# Altium PCB PCB1.PcbDoc
Units mm, origin at the board's own origin, x right, y up, seen from the top; angles counter-clockwise.
Board outline 35.8 x 35.8 mm, 2 copper layers (Top Layer, Bottom Layer), stack 1.569 mm thick; 44 components, 35 nets, 132 pads, 30 vias.
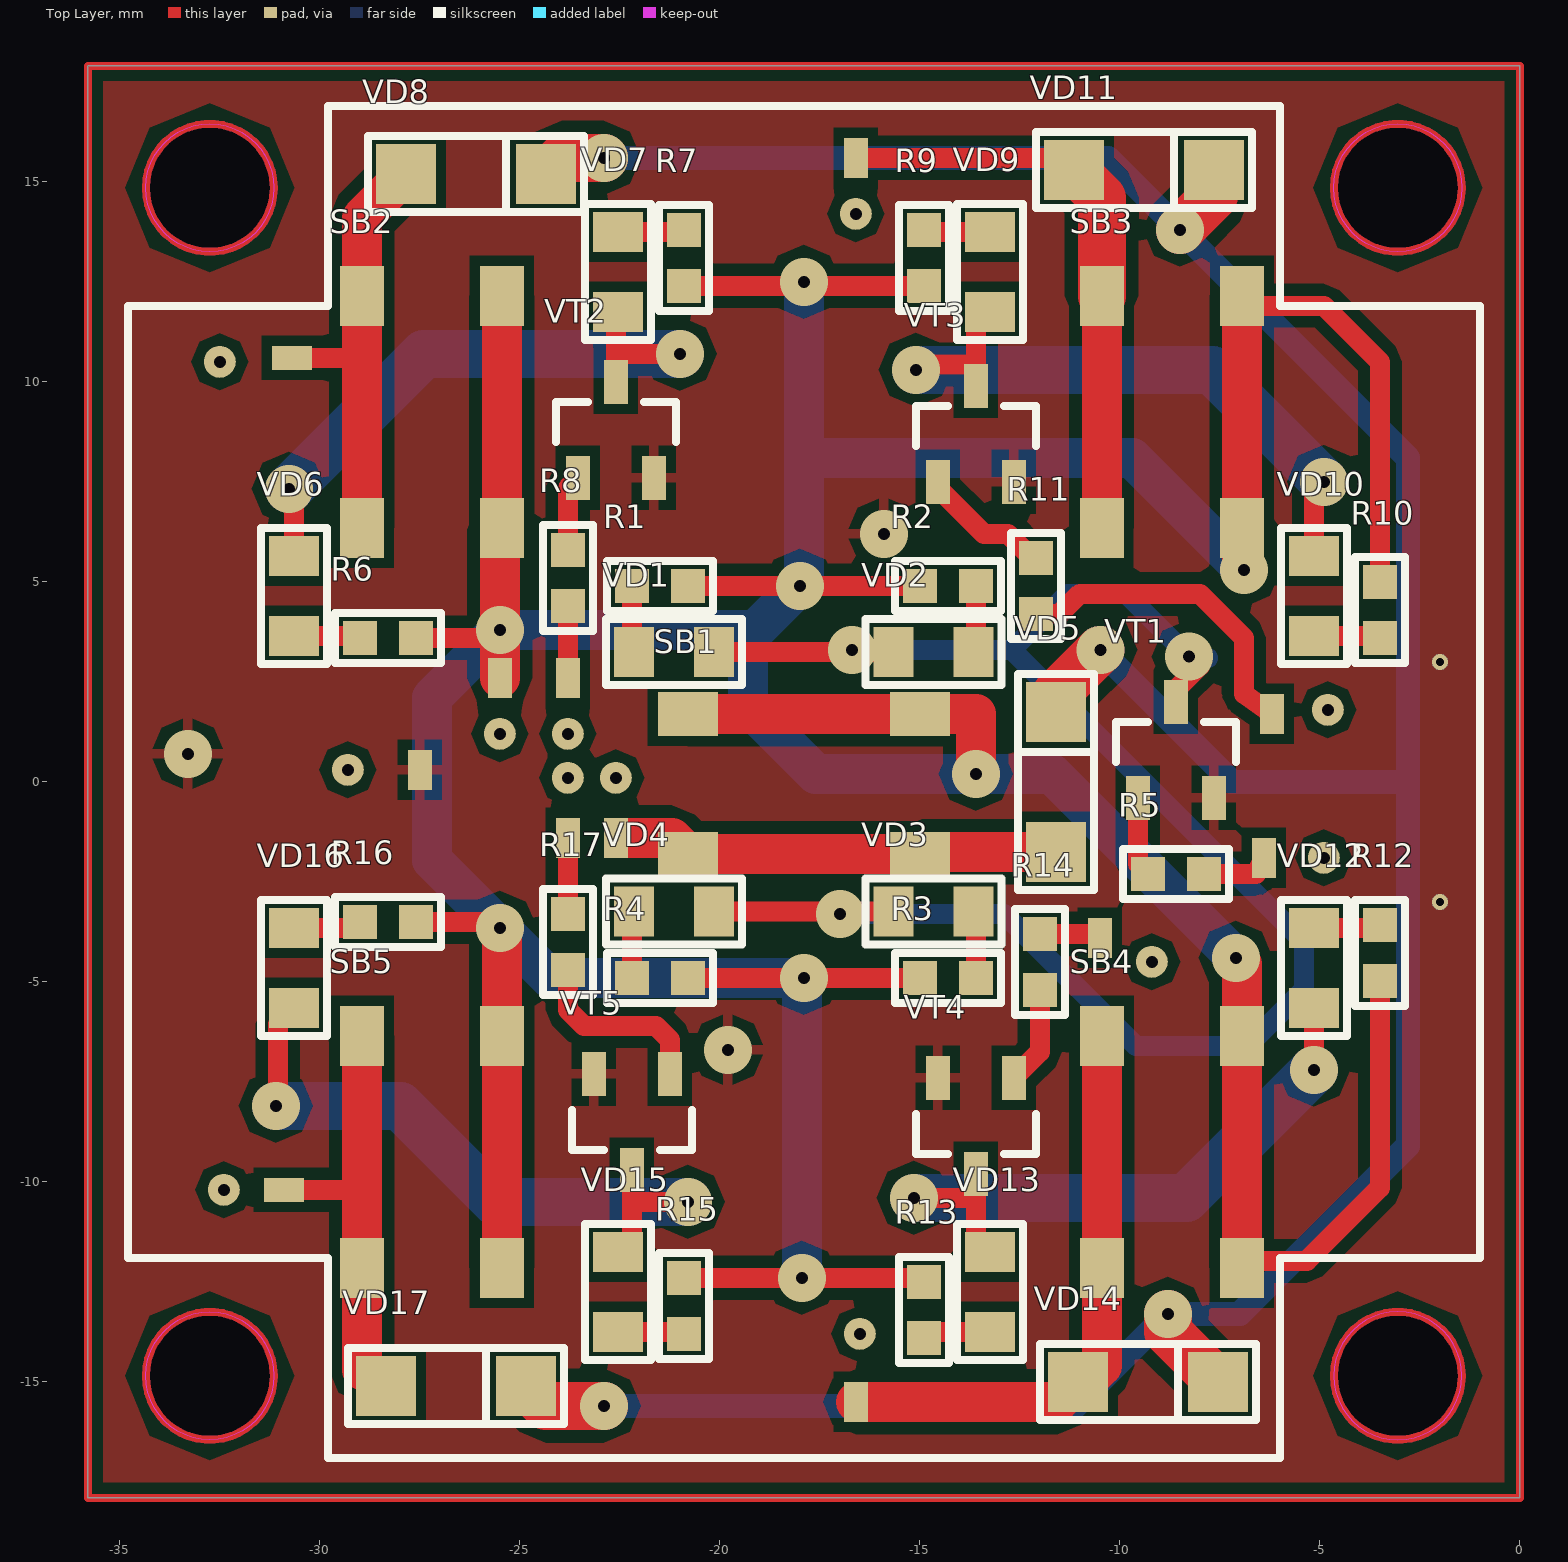
[diagram p0: Top Layer view]
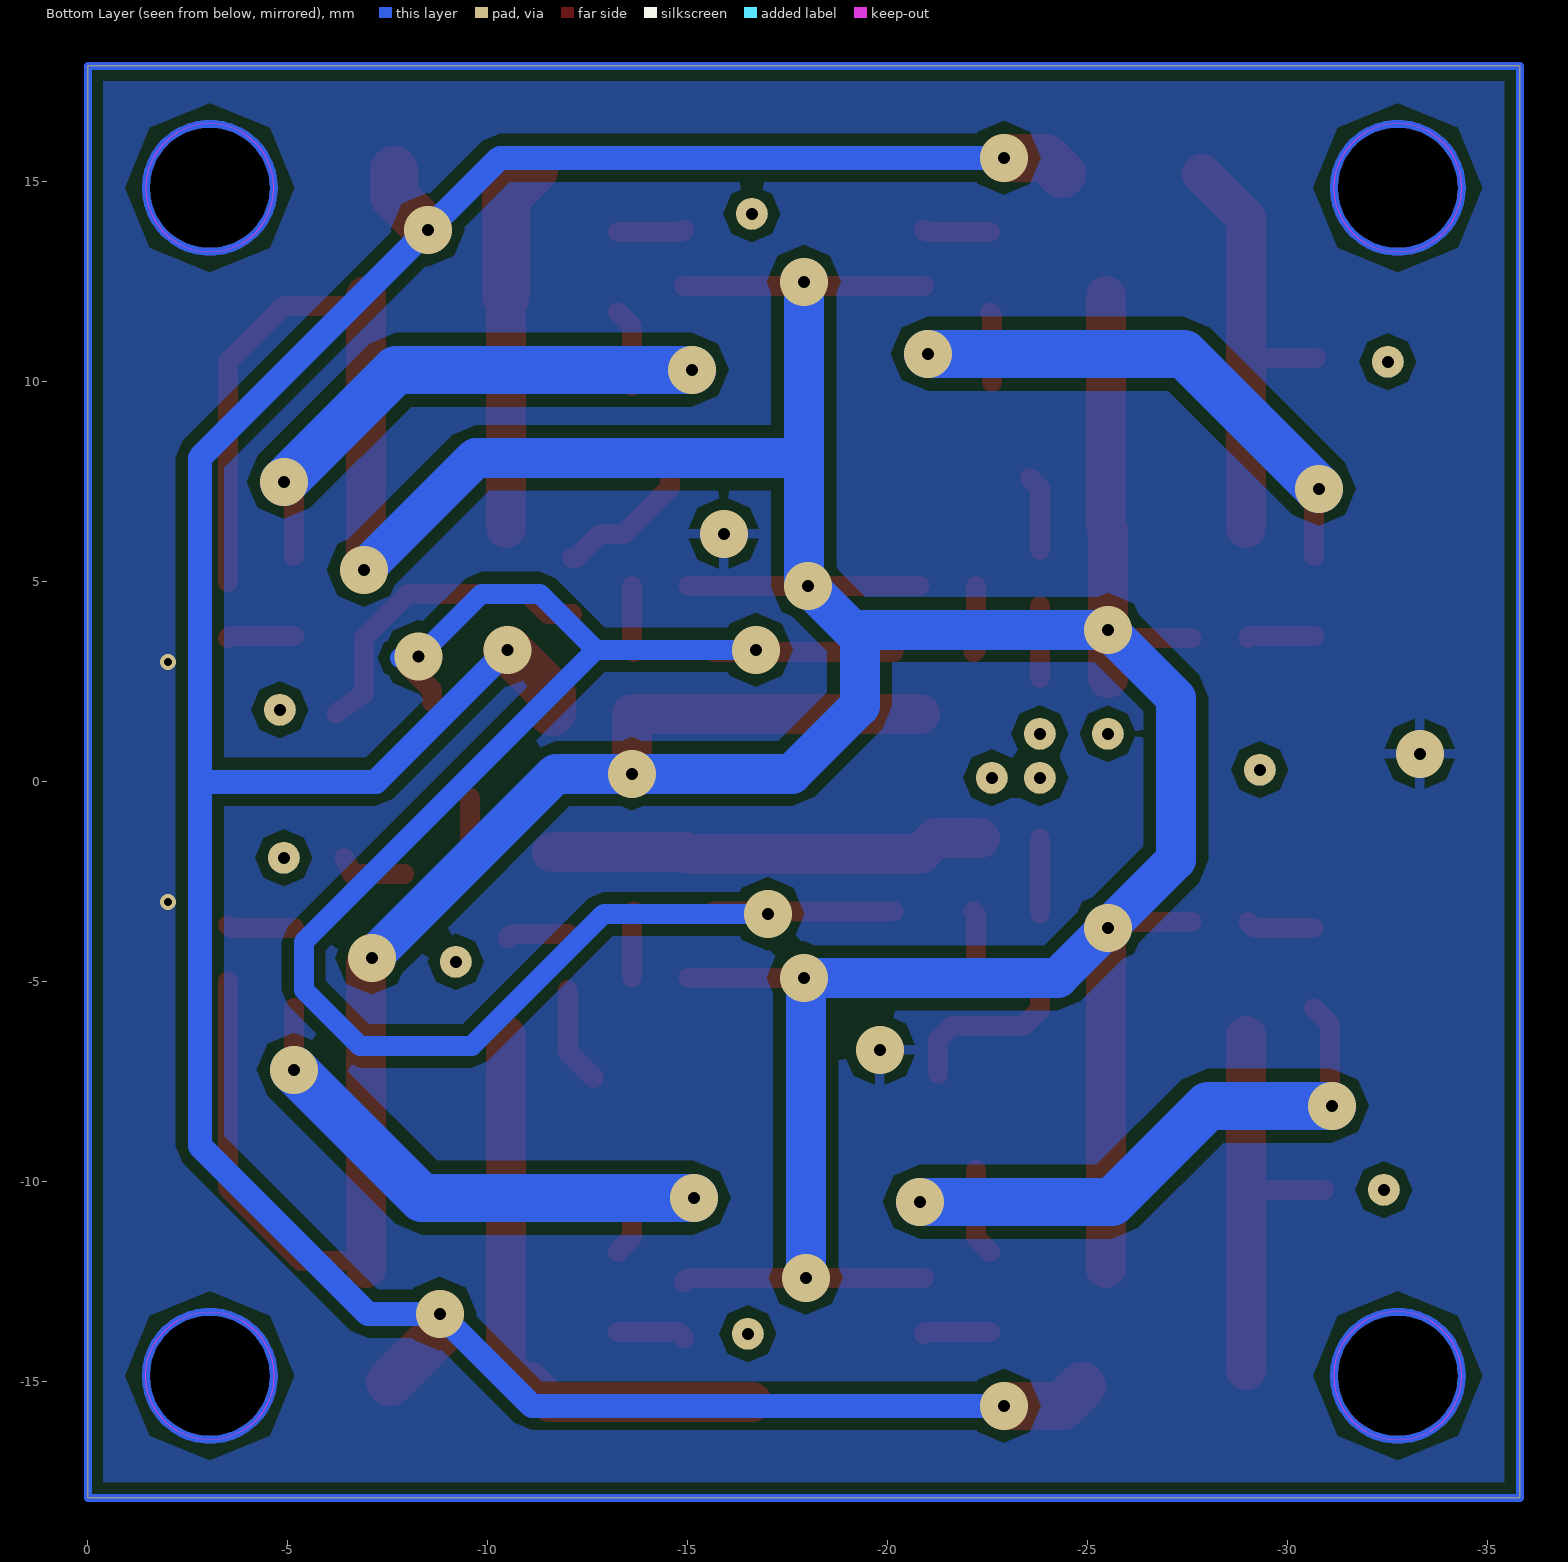
[diagram p1: Bottom Layer view, seen from below]
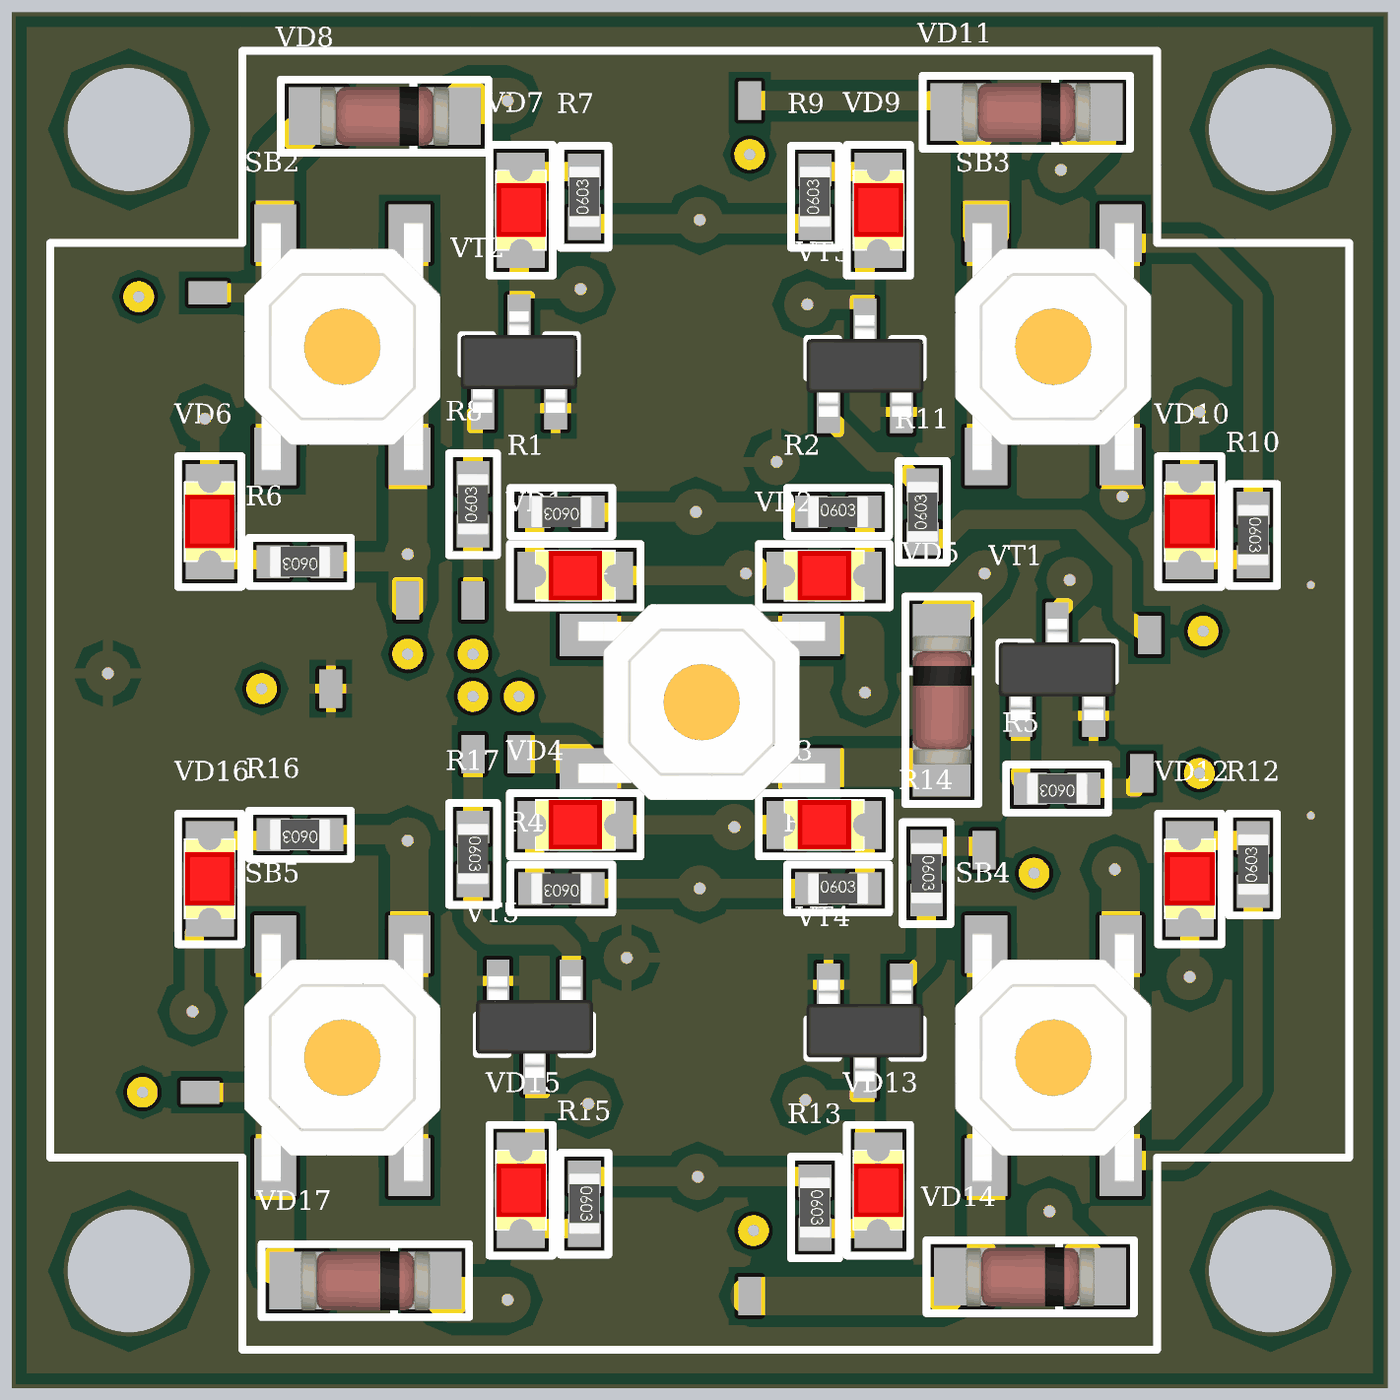
[diagram p2: 3D render of the assembled board from above, using the file's embedded part models]

## Layer stack, top to bottom
Top Solder: solder mask 0.0254, SM-001, Dk 4
Top Layer: signal copper 0.035
Dielectric 1: core 1.4986, Core-043, Dk 4.3
Bottom Layer: signal copper 0.035
Bottom Solder: solder mask 0.0254, SM-001, Dk 4

## Board outline
-35.8,2.1 -35.8,17.9 0,17.9 0,-17.9 -35.8,-17.9
cut-out: -4.65,-14.85 ccw(c-3.05,-14.85) -3.05,-16.45 ccw(c-3.05,-14.85) -1.45,-14.85 ccw(c-3.05,-14.85) -3.05,-13.25 ccw(c-3.05,-14.85)
cut-out: -3.05,13.25 cw(c-3.05,14.85) -4.65,14.85 cw(c-3.05,14.85) -3.05,16.45 cw(c-3.05,14.85) -1.45,14.85 cw(c-3.05,14.85)
cut-out: -32.75,-16.45 cw(c-32.75,-14.85) -34.35,-14.85 cw(c-32.75,-14.85) -32.75,-13.25 cw(c-32.75,-14.85) -31.15,-14.85 cw(c-32.75,-14.85)
cut-out: -32.75,13.25 cw(c-32.75,14.85) -34.35,14.85 cw(c-32.75,14.85) -32.75,16.45 cw(c-32.75,14.85) -31.15,14.85 cw(c-32.75,14.85)

## Design rules (kind name [scope] priority, off if disabled: settings)
Clearance [All] p1: gap=0.254 ignorepadtopadclearanceinfootprint=FALSE except(0: Arc-Hole Track-Hole SMDPad-Hole THPad-Hole Via-Hole Fill-Hole Poly-Hole Region-Hole Text-Hole)
PolygonConnect [All] p1: connectstyle=Relief reliefconductorwidth=0.254 reliefentries=4 polygonreliefangle="90 Angle" airgapwidth=0.254
RoutingVias [All] p1: holewidth=0.711 width=1.27 viastyle="Through Hole" minholewidth=0.711 minwidth=1.27 maxholewidth=0.711 maxwidth=1.27
SolderMaskExpansion [All] p1: expansion=0.102 istentingtop=FALSE
Width [All] p1: maxlimit=5 minlimit=0.1 preferedwidth=0.254
30 further rules are at their usual default settings.

## Components (designator, comment, footprint, x,y, rotation, side; value= is the part's Value field where it differs from the comment)
R1 "Resistor film, 100R, ±5%, 0603, 0.1W, -55...+125°C" "RES: 0603" -21.5,4.9 r180 top value=100R
R2 "Resistor film, 100R, ±5%, 0603, 0.1W, -55...+125°C" "RES: 0603" -14.3,4.9 r0 top value=100R
R3 "Resistor film, 100R, ±5%, 0603, 0.1W, -55...+125°C" "RES: 0603" -14.3,-4.9 r0 top value=100R
R4 "Resistor film, 100R, ±5%, 0603, 0.1W, -55...+125°C" "RES: 0603" -21.5,-4.9 r180 top value=100R
R5 "Resistor film, 100R, ±5%, 0603, 0.1W, -55...+125°C" "RES: 0603" -8.6,-2.3 r180 top value=100R
R6 "Resistor film, 100R, ±5%, 0603, 0.1W, -55...+125°C" "RES: 0603" -28.3,3.6 r180 top value=100R
R7 "Resistor film, 100R, ±5%, 0603, 0.1W, -55...+125°C" "RES: 0603" -20.9,13.1 r90 top value=100R
R8 "Resistor film, 100R, ±5%, 0603, 0.1W, -55...+125°C" "RES: 0603" -23.8,5.1 r90 top value=100R
R9 "Resistor film, 100R, ±5%, 0603, 0.1W, -55...+125°C" "RES: 0603" -14.9,13.1 r90 top value=100R
R10 "Resistor film, 100R, ±5%, 0603, 0.1W, -55...+125°C" "RES: 0603" -3.5,4.3 r270 top value=100R
R11 "Resistor film, 100R, ±5%, 0603, 0.1W, -55...+125°C" "RES: 0603" -12.1,4.9 r90 top value=100R
R12 "Resistor film, 100R, ±5%, 0603, 0.1W, -55...+125°C" "RES: 0603" -3.5,-4.275 r90 top value=100R
R13 "Resistor film, 100R, ±5%, 0603, 0.1W, -55...+125°C" "RES: 0603" -14.9,-13.2 r270 top value=100R
R14 "Resistor film, 100R, ±5%, 0603, 0.1W, -55...+125°C" "RES: 0603" -12,-4.5 r270 top value=100R
R15 "Resistor film, 100R, ±5%, 0603, 0.1W, -55...+125°C" "RES: 0603" -20.9,-13.1 r270 top value=100R
R16 "Resistor film, 100R, ±5%, 0603, 0.1W, -55...+125°C" "RES: 0603" -28.3,-3.5 r180 top value=100R
R17 "Resistor film, 100R, ±5%, 0603, 0.1W, -55...+125°C" "RES: 0603" -23.8,-4 r270 top value=100R
SB1 "Tactile button, 6x6mm" "BUT: 5X5 SMD" -17.9,0 r180 top
SB2 "Tactile button, 6x6mm" "BUT: 5X5 SMD" -27.15,9.25 r90 top locked
SB3 "Tactile button, 6x6mm" "BUT: 5X5 SMD" -8.65,9.25 r90 top locked
SB4 "Tactile button, 6x6mm" "BUT: 5X5 SMD" -8.65,-9.25 r90 top locked
SB5 "Tactile button, 6x6mm" "BUT: 5X5 SMD" -27.15,-9.25 r90 top locked
VD1 "LED, Green, *, *, *, -55...+150°C" "LED: 0805R" -21.14,3.24 r0 top locked
VD2 "LED, Green, *, *, *, -55...+150°C" "LED: 0805R" -14.66,3.24 r180 top locked
VD3 "LED, Green, *, *, *, -55...+150°C" "LED: 0805R" -14.66,-3.24 r180 top locked
VD4 "LED, Green, *, *, *, -55...+150°C" "LED: 0805R" -21.14,-3.24 r0 top locked
VD5 "Single diode, 75V, 150mA, 1V, 4ns, SOD-323, -55...+150°C" "DIODE: SOD80" -11.6,0 r90 top
VD6 "LED, Green, *, *, *, -55...+150°C" "LED: 0805R" -30.65,4.65 r90 top locked
VD7 "LED, Green, *, *, *, -55...+150°C" "LED: 0805R" -22.55,12.75 r270 top locked
VD8 "Single diode, 75V, 150mA, 1V, 4ns, SOD-323, -55...+150°C" "DIODE: SOD80" -26.1,15.2 r0 top
VD9 "LED, Green, *, *, *, -55...+150°C" "LED: 0805R" -13.25,12.75 r270 top locked
VD10 "LED, Green, *, *, *, -55...+150°C" "LED: 0805R" -5.15,4.65 r90 top locked
VD11 "Single diode, 75V, 150mA, 1V, 4ns, SOD-323, -55...+150°C" "DIODE: SOD80" -9.4,15.3 r0 top
VD12 "LED, Green, *, *, *, -55...+150°C" "LED: 0805R" -5.15,-4.65 r270 top
VD13 "LED, Green, *, *, *, -55...+150°C" "LED: 0805R" -13.25,-12.75 r90 top locked
VD14 "Single diode, 75V, 150mA, 1V, 4ns, SOD-323, -55...+150°C" "DIODE: SOD80" -9.3,-15 r0 top
VD15 "LED, Green, *, *, *, -55...+150°C" "LED: 0805R" -22.55,-12.75 r90 top locked
VD16 "LED, Green, *, *, *, -55...+150°C" "LED: 0805R" -30.65,-4.65 r270 top locked
VD17 "Single diode, 75V, 150mA, 1V, 4ns, SOD-323, -55...+150°C" "DIODE: SOD80" -26.6,-15.1 r0 top
VT1 "NPN transistor, 45V, 100mA, 100MHz, 300mW, 0.6V, 420, SOT-23, -55...+125°C" SOT23 -8.6,0.8 r90 top
VT2 "NPN transistor, 45V, 100mA, 100MHz, 300mW, 0.6V, 420, SOT-23, -55...+125°C" SOT23 -22.6,8.8 r90 top
VT3 "NPN transistor, 45V, 100mA, 100MHz, 300mW, 0.6V, 420, SOT-23, -55...+125°C" SOT23 -13.6,8.7 r90 top
VT4 "NPN transistor, 45V, 100mA, 100MHz, 300mW, 0.6V, 420, SOT-23, -55...+125°C" SOT23 -13.6,-8.6 r270 top
VT5 "NPN transistor, 45V, 100mA, 100MHz, 300mW, 0.6V, 420, SOT-23, -55...+125°C" SOT23 -22.2,-8.5 r270 top

## Footprints (in the part's own frame and the unit in brackets; to place one, negate y for a bottom-side part, rotate by r counter-clockwise, add the part's x,y. Pads: shape width x height; smd on the part's side, far side on the other; paste and mask are expansions set on the pad)
"BUT: 5X5 SMD" [mm]
  rect 1.5x1.1 smd: 1(-2.9,1.8) 1(2.9,1.8) 2(-2.9,-1.7) 2(2.9,-1.7)
  body extent -3.28,-2.5 3.17,2.6, height 1.5
"DIODE: SOD80" [mm]
  rect 1.5x1.5 smd: 1(-1.75,0) 2(1.75,0)
  silkscreen extent -2.7,-0.95 2.7,0.95, body extent -1.68,-0.78 1.68,0.76, height 1.52
"LED: 0805R" [mm]
  rect 1x1.25 smd: 1(-1,0) 2(1,0)
  silkscreen extent -1.7,-0.82 1.7,0.82, body extent -1.05,-0.67 1.05,0.68, height 0.9
"RES: 0603" [mm]
  rect 0.85x0.85 smd: 1(-0.7,0) 2(0.7,0)
  silkscreen extent -1.33,-0.63 1.33,0.63, body extent -0.8,-0.4 0.8,0.4, height 0.44
SOT23 [mm]
  rect 1.1x0.6 smd: 1(-1.2,0.95) 2(-1.2,-0.95) 3(1.2,0)
  round 0.5 on Mech1: ""(-0.9,1.1)
  silkscreen extent -0.3,-1.5 0.7,1.5, body extent -1.32,-1.52 1.32,1.52, height 1.12

## Part data
R1 R2 R3 R4 R5 R6 R7 R8 R9 R10 R11 R12 R13 R14 R15 R16 R17: library part Resistor_0603, Manufacturer=Yageo, Package=0603, PartNumber=RC0603JR-07100RL, Power=0.1W, Temperature=-55...+125°C, Tolerance=±5%, TypeResistor="Resistor film", HelpURL=https://www.digikey.com/product-detail/en/yageo/RC0603JR-07100RL/311-100GRCT-ND/729644, ValueManufacturerPartNumber="Resistor film, 100R, ±5%, 0603, 0.1W, -55...+125°C"
SB1 SB2 SB3 SB4 SB5: library part Button_tactile, Manufacturer="TE Connectivity", Package=6x6mm, PartNumber=FSM2JSMAATR, HelpURL=https://www.digikey.com/product-detail/en/te-connectivity-alcoswitch-switches/FSM2JSMAATR/450-1792-1-ND/3503931, TypeButton="Tactile button", ValueManufacturerPartNumber="Tactile button, 6x6mm"
  SB1: CommentText="\"Кнопка центральная\""
  SB2: CommentText="\"Кнопка 1\""
  SB3: CommentText="\"Кнопка 2\""
  SB4: CommentText="\"Кнопка 3\""
  SB5: CommentText="\"Кнопка 4\""
VD1 VD2 VD3 VD4 VD6 VD7 VD9 VD10 VD12 VD13 VD15 VD16: library part LED_single, Color=RED, ColorParameter=Green, Temperature=-55...+150°C, TypeDiode=LED, ValueManufacturerPartNumber="LED, Green, *, *, *, -55...+150°C"
VD5 VD8 VD11 VD14 VD17: library part Diode_single, Current=150mA, Manufacturer="Micro Commercial", Package=SOD-323, PartNumber=1N4148WX-TP, Temperature=-55...+150°C, Voltage=75V, VoltageDrop=1V, HelpURL=https://www.digikey.com/product-detail/en/micro-commercial-co/1N4148WX-TP/1N4148WXTPMSCT-ND/717312, RecoveryTime=4ns, TypeDiode="Single diode", ValueManufacturerPartNumber="Single diode, 75V, 150mA, 1V, 4ns, SOD-323, -55...+150°C"
VT1 VT2 VT3 VT4 VT5: library part BJT_NPN_132, CurrentCE=100mA, CurrentGain=420, Frequency=100MHz, Manufacturer="ON Semiconductor", MaxPower=300mW, Package=SOT-23, PartNumber=BC847CLT1G, Temperature=-55...+125°C, VoltageCE=45V, VoltageSaturation=0.6V, HelpURL=https://www.digikey.com/product-detail/en/on-semiconductor/BC847CLT1G/BC847CLT1GOSCT-ND/917836, TypeTransistor="NPN transistor", ValueManufacturerPartNumber="NPN transistor, 45V, 100mA, 100MHz, 300mW, 0.6V, 420, SOT-23, -55...+125°C"

## Free pads (board coordinates)
  rect 1x0.6 smd: 2(-30.9,-10.2) 2(-30.7,10.6)
  rect 0.6x1 smd: 2(-27.5,0.3) 2(-25.5,2.6) 2(-23.8,-1.4) 2(-23.8,2.6) 2(-22.6,-1.4) 2(-16.6,-15.5) 2(-16.6,15.6) 2(-10.5,-3.9) 2(-6.4,-1.9) 2(-6.2,1.7)
  round 0.8 hole 0.3: 3(-29.3,0.3) 4(-32.5,10.5) 5(-23.8,1.2) 5(-22.6,0.1) 6(-25.5,1.2) 6(-23.8,0.1) 7(-32.4,-10.2) 8(-9.2,-4.5) 9(-4.9,-1.9) 10(-4.8,1.8) 11(-16.6,14.2) 12(-16.5,-13.8)

## Via types
v1: diameter 1.2, hole 0.3, Top Layer to Bottom Layer, tented both sides, 28 vias
v2: diameter 0.4, hole 0.2, Top Layer to Bottom Layer, tented both sides, 2 vias

## Nets (pads, with @x,y where several pads share a name; then routed paths per layer and width w, separated by ;. In a path a pad name is that pad's centre, name@x,y a point inside that pad or via, vN(x,y) a via of type N, cw(c..) or ccw(c..) an arc to the next point about the centre after c; other vN are vias at no path point)
+3.3: pad.2@-25.5,2.6 R1.1 R2.1 R3.1 R4.1 R6.1 R7.1 R9.1 R10.1 R12.1 R13.1 R15.1 R16.1 SB1.2 SB2.2 SB3.2 SB4.2 SB5.2 | length 157.7
  Top Layer w0.5: R16.1 -25.6,-3.5 v1@-25.4,-3.7 ; R6.1 -25.7,3.6 v1(-25.5,3.8) ; R15.1 v1(-17.95,-12.4) -15,-12.4 R13.1 ; R7.1 R9.1 ; R4.1 v1(-17.9,-4.9) R3.1 ; R1.1 v1(-18,4.9) R2.1 ; SB4.2@-6.95,-12.15 -6.775,-11.975 -5.325,-11.975 -3.5,-10.15 R12.1 ; SB3.2@-6.95,12.15 -6.7,11.9 -4.9,11.9 -3.5,10.5 R10.1
  Top Layer w1: v1(-25.5,-3.65) -25.5,-3.7 -25.45,-3.75 -25.45,-6.35 SB5.2@-25.45,-12.15 ; pad.2@-25.5,2.6 v1(-25.5,3.8) -25.5,6.3 -25.45,6.35 SB2.2@-25.45,12.15 ; SB1.2@-20.8,1.7 -15,1.7 -13.6,1.7 v1(-13.6,0.2) ; v1(-7.1,-4.4) -6.95,-4.55 -6.95,-6.35 SB4.2@-6.95,-12.15 ; v1@-6.95,5.3 -6.95,6.35 SB3.2@-6.95,12.15
  Bottom Layer w1: v1(-17.95,-12.4) -17.95,-4.95 v1(-17.9,-4.9) -24.25,-4.9 v1(-25.5,-3.65) -27.2,-1.95 -27.2,2.1 v1(-25.5,3.8) -19.1,3.8 ; v1(-17.9,12.5) -17.9,8.1 ; v1(-7.1,-4.4) -11.7,0.2 v1(-13.6,0.2) -17.6,0.2 -19.3,1.9 -19.3,3.6 -19.1,3.8 ; v1(-6.9,5.3) -9.7,8.1 -17.9,8.1 ; -19.1,3.8 v1(-18,4.9) -17.9,5 -17.9,8.1
GND: pad.2@-27.5,0.3 VT1.2 VT2.2 VT3.2 VT4.2 VT5.2
  other v1: -19.8,-6.7 -33.3,0.7 -15.9,6.2
  other v2: -2,-3 -2,3
NetR1_2: R1.2 VD1.1 | length 1.7
  Top Layer w0.5: R1.2 -22.2,3.3 VD1.1
NetR2_2: R2.2 VD2.1 | length 1.7
  Top Layer w0.5: VD2.1 -13.6,3.3 R2.2
NetR3_2: R3.2 VD3.1 | length 1.7
  Top Layer w0.5: VD3.1 -13.6,-3.3 R3.2
NetR4_2: R4.2 VD4.1 | length 1.7
  Top Layer w0.5: R4.2 -22.2,-3.3 VD4.1
NetR5_1: pad.2@-6.4,-1.9 R5.1 | length 1.7
  Top Layer w0.5: R5.1 -6.6,-2.3 pad.2@-6.4,-1.9
NetR5_2: R5.2 VT1.1 | length 2
  Top Layer w0.5: VT1.1 -9.55,-2.05 R5.2
NetR6_2: R6.2 VD6.1 | length 1.7
  Top Layer w0.5: VD6.1 -29.05,3.65 R6.2
NetR7_2: R7.2 VD7.1 | length 1.7
  Top Layer w0.5: VD7.1 -20.95,13.75 R7.2
NetR8_1: pad.2@-23.8,2.6 R8.1 | length 1.8
  Top Layer w0.5: pad.2@-23.8,2.6 R8.1
NetR8_2: R8.2 VT2.1 | length 1.9
  Top Layer w0.5: R8.2 -23.8,7.35 VT2.1
NetR9_2: R9.2 VD9.1 | length 1.7
  Top Layer w0.5: R9.2 -14.85,13.75 VD9.1
NetR10_2: R10.2 VD10.1 | length 1.7
  Top Layer w0.5: VD10.1 -3.55,3.65 R10.2
NetR11_1: pad.2@-6.2,1.7 R11.1 | length 8.1
  Top Layer w0.5: R11.1 -11.5,4.2 -11,4.7 -8,4.7 -6.9,3.6 -6.9,2.2 pad.2@-6.2,1.7
NetR11_2: R11.2 VT3.1 | length 3.3
  Top Layer w0.5: VT3.1 -14.55,7.35 -13.4,6.2 -12.8,6.2 -12.2,5.6 R11.2
NetR12_2: R12.2 VD12.1 | length 1.7
  Top Layer w0.5: VD12.1 -3.575,-3.65 R12.2
NetR13_2: R13.2 VD13.1 | length 1.7
  Top Layer w0.5: R13.2 -14.75,-13.75 VD13.1
NetR14_1: pad.2@-10.5,-3.9 R14.1 | length 1.5
  Top Layer w0.5: R14.1 -10.6,-3.8 pad.2@-10.5,-3.9
NetR14_2: R14.2 VT4.1 | length 2.5
  Top Layer w0.5: VT4.1 -12,-6.75 R14.2
NetR15_2: R15.2 VD15.1 | length 1.7
  Top Layer w0.5: VD15.1 -20.95,-13.75 R15.2
NetR16_2: R16.2 VD16.1 | length 1.7
  Top Layer w0.5: VD16.1 -29.15,-3.65 R16.2
NetR17_1: pad.2@-23.8,-1.4 R17.1 | length 1.9
  Top Layer w0.5: R17.1 pad.2@-23.8,-1.4
NetR17_2: R17.2 VT5.1 | length 4.7
  Top Layer w0.5: R17.2 -23.8,-5.7 -23.4,-6.1 -21.6,-6.1 -21.25,-6.45 VT5.1
NetSB1_1: pad.2@-22.6,-1.4 SB1.1 VD5.1 | length 10.9
  Top Layer w1: -22.3,-1.4 -21.2,-1.4 -20.8,-1.8 -15,-1.8 -14.95,-1.75 VD5.1
NetSB2_1: pad.2@-30.7,10.6 SB2.1 VD8.1 | length 11.1
  Top Layer w0.5: pad.2@-30.7,10.6 -29.15,10.6 -29.05,10.5 -28.95,10.6
  Top Layer w1: SB2.1@-28.95,6.35 -28.95,10.6 -28.95,12.15 -28.95,14.1 VD8.1
NetSB3_1: pad.2@-16.6,15.6 SB3.1 VD11.1 | length 14.8
  Top Layer w0.5: pad.2@-16.6,15.6 -11.45,15.6 VD11.1
  Top Layer w1: SB3.1@-10.45,6.35 SB3.1@-10.45,12.15
  Top Layer w1.2: VD11.1 -10.45,14.6 SB3.1@-10.45,12.15
NetSB4_1: pad.2@-16.6,-15.5 SB4.1 VD14.1 | length 14.6
  Top Layer w1: pad.2@-16.6,-15.5 -11.55,-15.5 VD14.1 ; VD14.1@-10.85,-15 -10.45,-14.6 -10.45,-12.15 SB4.1@-10.45,-6.35
NetSB5_1: pad.2@-30.9,-10.2 SB5.1 VD17.1 | length 10.3
  Top Layer w0.5: pad.2@-30.9,-10.2 -28.95,-10.2
  Top Layer w1: VD17.1@-28.95,-14.7 -28.95,-12.15 -28.95,-10.2 SB5.1@-28.95,-6.35
NetVD1_2: VD1.2 VD2.2 VD3.2 VD4.2 VT1.3 | length 45.6
  Top Layer w0.5: VD4.2 VD3.2 ; VD1.2 VD2.2 ; VT1.3 -8.6,2.3 -8,2.9 -8.2,3.1 -8.272,3.1 v1(-8.272,3.128)
  Bottom Layer w0.5: v1(-17,-3.3) -12.9,-3.3 -9.6,-6.6 -6.8,-6.6 -5.4,-5.2 -5.4,-4 -12.7,3.3 ; v1(-16.7,3.3) -12.7,3.3 ; v1(-8.272,3.128) -8.272,3.1 -8.244,3.1 -9.844,4.7 -11.3,4.7 -12.7,3.3 ; v1@-8.05,3.1 v1@-7.8,3.1
NetVD5_2: VD5.2 VD8.2 VD11.2 VD14.2 VD17.2 | length 82.1
  Top Layer w1.2: VD17.2 -24.35,-15.6 v1(-22.9,-15.6) ; VD8.2 -23.95,15.6 v1(-22.9,15.6) ; VD5.2 -11.6,2.2 -10.5,3.3 v1(-10.487,3.3) ; v1(-8.8,-13.3) -8.8,-13.75 VD14.2 ; v1(-8.5,13.8) -7.65,14.65 VD11.2
  Bottom Layer w0.6: v1(-22.9,-15.6) -11.1,-15.6 v1(-8.8,-13.3) -7,-13.3 -2.8,-9.1 -2.8,0 ; v1(-22.9,15.6) -10.3,15.6 v1(-8.5,13.8) -2.8,8.1 -2.8,0 ; v1(-10.487,3.3) -10.487,3.287 -7.2,0 -2.8,0
NetVD6_2: VD6.2 VD7.2 VT2.3 | length 16.6
  Top Layer w0.5: v1(-30.775,7.325) -30.65,7.45 VD6.2 ; VT2.3 -22.6,10.85 ; VD7.2 -22.6,11.7 -22.6,10.85 ; v1(-21,10.7) -22.45,10.7 -22.55,10.8 -22.6,10.85
  Bottom Layer w1.2: v1(-30.775,7.325) -27.4,10.7 v1(-21,10.7)
NetVD9_2: VD9.2 VD10.2 VT3.3 | length 16.9
  Top Layer w0.5: v1(-15.1,10.3) -14.967,10.433 VT3.3@-13.6,10.433 ; VT3.3 VT3.3@-13.6,10.433 ; VD9.2 -13.6,11.4 VT3.3@-13.6,10.433 ; VD10.2 -5.15,7.25 v1(-4.9,7.5)
  Bottom Layer w1.2: v1(-15.1,10.3) -7.7,10.3 v1(-4.9,7.5)
NetVD12_2: VD12.2 VD13.2 VT4.3 | length 16
  Top Layer w0.5: v1(-15.15,-10.4) -13.625,-10.4 -13.6,-10.375 -13.6,-11.4 VD13.2 ; v1(-5.15,-7.2) VD12.2
  Bottom Layer w1.2: v1(-15.15,-10.4) -8.35,-10.4 v1(-5.15,-7.2)
NetVD15_2: VD15.2 VD16.2 VT5.3 | length 17.6
  Top Layer w0.5: v1(-31.1,-8.1) -31.1,-7.9 -31.044,-7.844 -31.05,-7.838 -31.05,-6.05 VD16.2 ; VD15.2 -22.2,-11.4 -22.2,-10.55 ; VT5.3 -22.2,-10.55 ; v1(-20.8,-10.5) -22.15,-10.5 -22.2,-10.55
  Bottom Layer w1.2: v1(-31.1,-8.1) -28,-8.1 -25.6,-10.5 v1(-20.8,-10.5)
pads on no net: VT1. VT2. VT3. VT4. VT5.

## Polygon pours and split planes (outlines as drawn)
GND on Bottom Layer "GND_TOP_2" (solid, pour order 0): -35.8,17.9 -35.8,-17.9 0,-17.9 0,17.9
GND on Top Layer "GND_TOP_2" (solid, pour order 1): -35.8,-17.9 0,-17.9 0,17.9 -35.8,17.9

## Other copper
Multi-Layer:
  circle w0.2: c-32.75,-14.85 r1.6
  circle w0.2: c-3.05,-14.85 r1.6
  circle w0.2: c-3.05,14.85 r1.6
  circle w0.2: c-32.75,14.85 r1.6
  lines w0.2: -35.8,-17.9 -25.8,-17.9 -5.8,-17.9 -0.8,-17.9 0,-17.9 0,17.9 -35.8,17.9 -35.8,17.1 -35.8,12.1 -35.8,2.1 -35.8,-17.9

## Silkscreen, mask and mechanical layers (free items; w line width, h text height)
Top Overlay:
  lines w0.2: -34.8,-11.9 -31.8,-11.9 -29.8,-11.9 -29.8,-13.9 -29.8,-16.9 -6,-16.9 -6,-13.9 -6,-11.9 -4,-11.9 -1,-11.9 -1,11.9 -4,11.9 -6,11.9 -6,13.9 -6,16.9 -29.8,16.9 -29.8,13.9 -29.8,11.9 -31.8,11.9 -34.8,11.9 -34.8,-11.9